# Altium PCB ChristmasTree.PcbDoc
Units mil, origin at the board's own origin, x right, y up, seen from the top; angles counter-clockwise.
Board outline 3307.09 x 3937.01 mil, 2 copper layers (Top Layer, Bottom Layer); 114 components, 133 nets, 342 pads, 10 vias.
Unrouted connection lines stored in the file: 149.
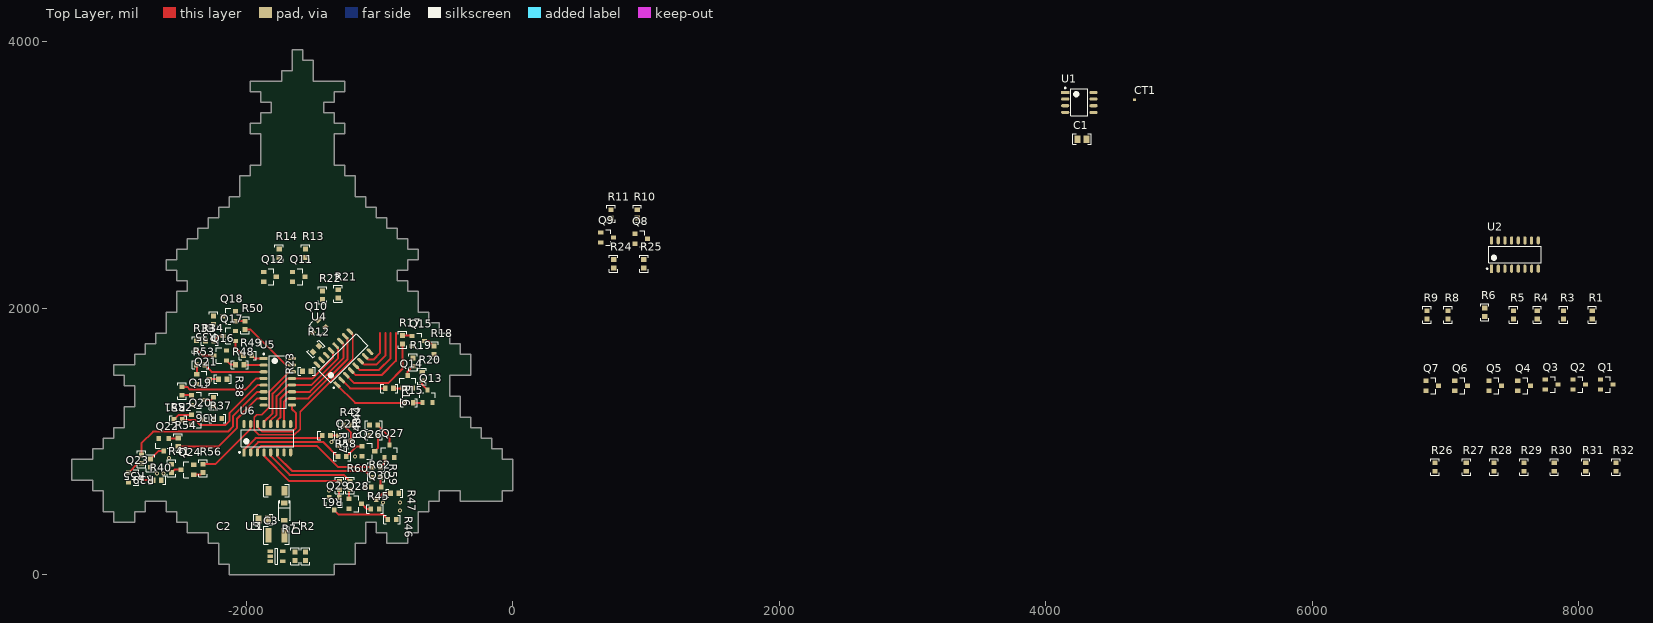
[diagram p0: Top Layer view]
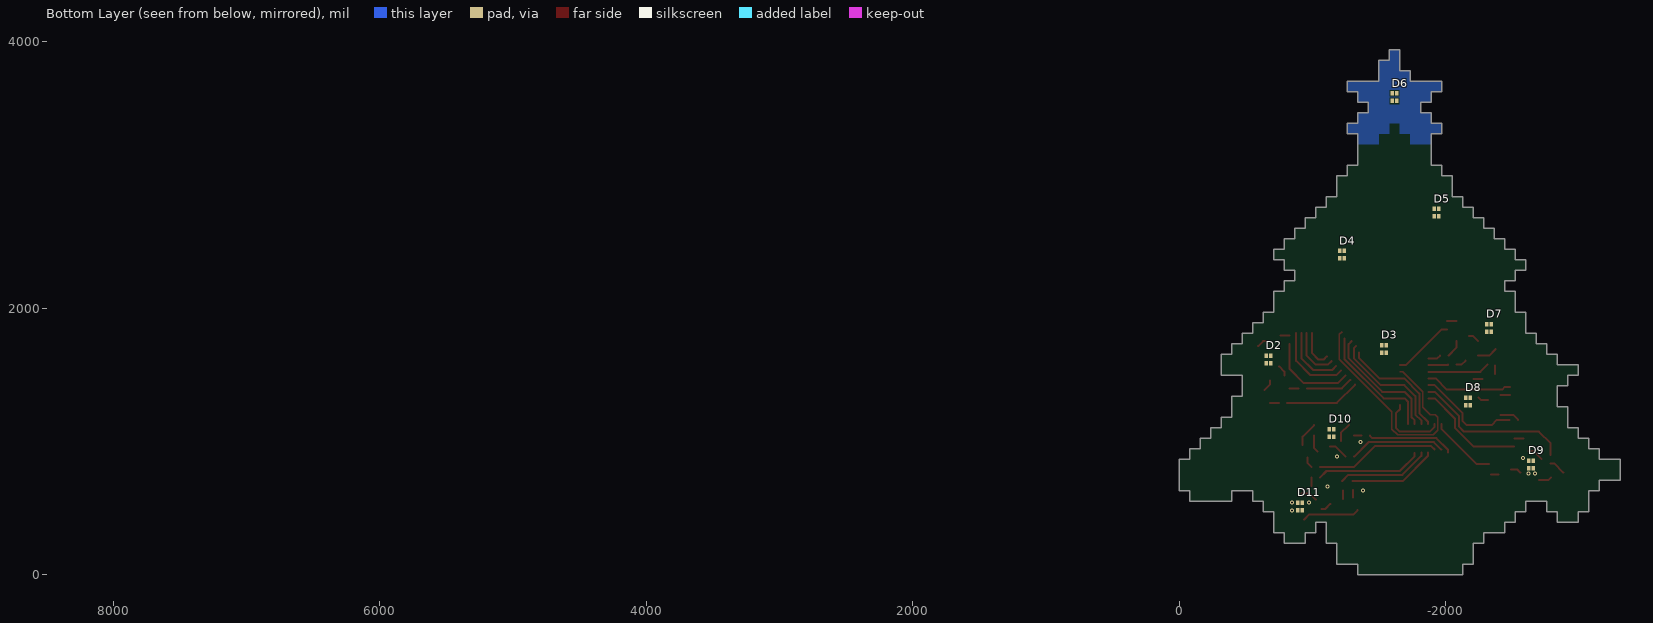
[diagram p1: Bottom Layer view, seen from below]

## Layer stack, top to bottom
Top Solder: solder mask 0.4, Solder Resist, Dk 3.5
Top Layer: signal copper 1.4
Dielectric 1: dielectric 12.6, FR-4, Dk 4.8
Bottom Layer: signal copper 1.4
Bottom Solder: solder mask 0.4, Solder Resist, Dk 3.5

## Board outline
-3149.61,629.92 -3149.61,708.66 -3307.09,708.66 -3307.09,866.14 -3149.61,866.14 -3149.61,944.88 -3070.87,944.88 -3070.87,1023.62 -2992.13,1023.62 -2992.13,1102.36 -2913.39,1102.36 -2913.39,1259.84 -2834.65,1259.84 -2834.65,1417.32 -2913.39,1417.32 -2913.39,1496.06 -2992.13,1496.06 -2992.13,1574.8 -2834.65,1574.8 -2834.65,1653.54 -2755.91,1653.54 -2755.91,1732.28 -2677.17,1732.28 -2677.17,1811.02 -2598.43,1811.02 -2598.43,1968.5 -2519.69,1968.5 -2519.69,2125.98 -2440.94,2125.98 -2440.94,2204.72 -2519.69,2204.72 -2519.69,2283.46 -2598.43,2283.46 -2598.43,2362.2 -2519.69,2362.2 -2519.69,2440.94 -2440.94,2440.94 -2440.94,2519.69 -2362.2,2519.69 -2362.2,2598.43 -2283.46,2598.43 -2283.46,2677.17 -2204.72,2677.17 -2204.72,2755.91 -2125.98,2755.91 -2125.98,2834.65 -2047.24,2834.65 -2047.24,2992.13 -1968.5,2992.13 -1968.5,3070.87 -1889.76,3070.87 -1889.76,3307.09 -1968.5,3307.09 -1968.5,3385.83 -1889.76,3385.83 -1889.76,3464.57 -1811.02,3464.57 -1811.02,3543.31 -1889.76,3543.31 -1889.76,3622.05 -1968.5,3622.05 -1968.5,3700.79 -1732.28,3700.79 -1732.28,3779.53 -1653.54,3779.53 -1653.54,3937.01 -1574.8,3937.01 -1574.8,3858.27 -1496.06,3858.27 -1496.06,3700.79 -1259.84,3700.79 -1259.84,3622.05 -1338.58,3622.05 -1338.58,3543.31 -1417.32,3543.31 -1417.32,3464.57 -1338.58,3464.57 -1338.58,3385.83 -1259.84,3385.83 -1259.84,3307.09 -1338.58,3307.09 -1338.58,3070.87 -1259.84,3070.87 -1259.84,2992.13 -1181.1,2992.13 -1181.1,2834.65 -1102.36,2834.65 -1102.36,2755.91 -1023.62,2755.91 -1023.62,2677.17 -944.88,2677.17 -944.88,2598.43 -866.14,2598.43 -866.14,2519.69 -787.4,2519.69 -787.4,2440.94 -708.66,2440.94 -708.66,2362.2 -787.4,2362.2 -787.4,2283.46 -866.14,2283.46 -866.14,2204.72 -787.4,2204.72 -787.4,2125.98 -708.66,2125.98 -708.66,1968.5 -629.92,1968.5 -629.92,1889.76 -551.18,1889.76 -551.18,1811.02 -472.44,1811.02 -472.44,1732.28 -393.7,1732.28 -393.7,1653.54 -314.96,1653.54 -314.96,1496.06 -472.44,1496.06 -472.44,1338.58 -393.7,1338.58 -393.7,1181.1 -314.96,1181.1 -314.96,1102.36 -236.22,1102.36 -236.22,1023.62 -157.48,1023.62 -157.48,944.88 -78.74,944.88 -78.74,866.14 0,866.14 0,629.92 -78.74,629.92 -78.74,551.18 -393.7,551.18 -393.7,629.92 -551.18,629.92 -551.18,551.18 -629.92,551.18 -629.92,472.44 -708.66,472.44 -708.66,314.96 -787.4,314.96 -787.4,236.22 -944.88,236.22 -944.88,314.96 -1023.62,314.96 -1023.62,393.7 -1102.36,393.7 -1102.36,236.22 -1181.1,236.22 -1181.1,78.74 -1338.58,78.74 -1338.58,0 -2125.98,0 -2125.98,78.74 -2204.72,78.74 -2204.72,236.22 -2283.46,236.22 -2283.46,314.96 -2440.94,314.96 -2440.94,393.7 -2519.69,393.7 -2519.69,472.44 -2598.43,472.44 -2598.43,551.18 -2755.91,551.18 -2755.91,472.44 -2834.65,472.44 -2834.65,393.7 -2992.13,393.7 -2992.13,472.44 -3070.87,472.44 -3070.87,629.92

## Design rules (kind name [scope] priority, off if disabled: settings)
Clearance [All] p1: gap=6.5
PolygonConnect NetC1Poly [InNet('NetC1_2')] p1: connectstyle=Direct reliefconductorwidth=10 reliefentries=4 polygonreliefangle="90 Angle" airgapwidth=10
PolygonConnect [All] p2: connectstyle=Relief reliefconductorwidth=10 reliefentries=4 polygonreliefangle="90 Angle" airgapwidth=10
RoutingVias [All] p1: holewidth=28 width=50 viastyle="Through Hole" minholewidth=28 minwidth=50 maxholewidth=28 maxwidth=50
SolderMaskExpansion [All] p1: expansion=0
Width [All] p1: maxlimit=196.85 minlimit=8 preferedwidth=10
30 further rules are at their usual default settings.

## Components (designator, comment, footprint, x,y, rotation, side; value= is the part's Value field where it differs from the comment)
C1 "100nF" "CAP 0805_N" 4271.65,3267.72 r0 top
C2 "4.7uF" "CAP 0805_N" -1870.08,413.39 r180 top
C3 "22uF" "CAP 1206_N" -1771.65,629.92 r0 top
CT1 "Capacitive Touch" CapTouch 4665.35,3562.99 r90 top
D1 "*" SOD-123-K1A2 -1712.6,472.44 r270 top
D2 "RGB LED Common Anode" "LED LTST-C19HE1WT" -669.29,1614.17 r180 bottom
D3 "RGB LED Common Anode" "LED LTST-C19HE1WT" -1535.43,1692.91 r180 bottom
D4 "RGB LED Common Anode" "LED LTST-C19HE1WT" -1220.47,2401.57 r180 bottom
D5 "RGB LED Common Anode" "LED LTST-C19HE1WT" -1929.13,2716.54 r180 bottom
D6 "RGB LED Common Anode" "LED LTST-C19HE1WT" -1614.17,3582.68 r180 bottom
D7 "RGB LED Common Anode" "LED LTST-C19HE1WT" -2322.83,1850.39 r0 bottom
D8 "RGB LED Common Anode" "LED LTST-C19HE1WT" -2165.35,1299.21 r0 bottom
D9 "RGB LED Common Anode" "LED LTST-C19HE1WT" -2637.8,826.77 r0 bottom
D10 "RGB LED Common Anode" "LED LTST-C19HE1WT" -1141.73,1062.99 r0 bottom
D11 "RGB LED Common Anode" "LED LTST-C19HE1WT" -905.51,511.81 r0 bottom locked
L1 "4.7uH" "CAP 1210_N" -1771.65,295.28 r180 top
Q1 "2N3904" SOT95P245X110-3N 8208.59,1427.16 r0 top
Q2 "2N3904" SOT95P245X110-3N 8001.9,1427.16 r0 top
Q3 "2N3904" SOT95P245X110-3N 7795.21,1427.16 r0 top
Q4 "2N3904" SOT95P245X110-3N 7588.58,1417.32 r0 top
Q5 "2N3904" SOT95P245X110-3N 7372.05,1417.32 r0 top
Q6 "2N3904" SOT95P245X110-3N 7116.14,1417.32 r0 top
Q7 "2N3904" SOT95P245X110-3N 6899.61,1417.32 r0 top
Q8 "2N3904" SOT95P245X110-3N 964.57,2519.69 r0 top
Q9 "2N3904" SOT95P245X110-3N 708.61,2529.52 r0 top
Q10 "2N3904" SOT95P245X110-3N -1466.54,1850.39 r225 top
Q11 "2N3904" SOT95P245X110-3N -1604.38,2234.25 r0 top
Q12 "2N3904" SOT95P245X110-3N -1820.92,2234.25 r0 top
Q13 "2N3904" SOT95P245X110-3N -639.76,1338.58 r90 top
Q14 "2N3904" SOT95P245X110-3N -787.4,1446.85 r90 top
Q15 "2N3904" SOT95P245X110-3N -708.66,1751.97 r0 top
Q16 "2N3904" SOT95P245X110-3N -2194.88,1643.7 r180 top
Q17 "2N3904" SOT95P245X110-3N -2125.98,1791.34 r180 top
Q18 "2N3904" SOT95P245X110-3N -2125.98,1938.98 r180 top
Q19 "2N3904" SOT95P245X110-3N -2362.2,1309.06 r0 top
Q20 "2N3904" SOT95P245X110-3N -2362.2,1161.42 r0 top
Q21 "2N3904" SOT95P245X110-3N -2322.83,1466.54 r0 top
Q22 "2N3904" SOT95P245X110-3N -2618.11,974.41 r270 top
Q23 "2N3904" SOT95P245X110-3N -2834.65,728.35 r0 top
Q24 "2N3904" SOT95P245X110-3N -2440.94,787.4 r180 top
Q25 "2N3904" SOT95P245X110-3N -1259.84,1003.94 r0 top
Q26 "2N3904" SOT95P245X110-3N -1082.68,925.2 r0 top
Q27 "2N3904" SOT95P245X110-3N -925.2,925.2 r90 top
Q28 "2N3904" SOT95P245X110-3N -1181.1,531.5 r0 top
Q29 "2N3904" SOT95P245X110-3N -1338.58,531.5 r270 top
Q30 "2N3904" SOT95P245X110-3N -1023.62,610.24 r270 top
R1 "Res" "RES 0603_N" 8100.39,1948.82 r90 top
R2 "5.62k" "RES 0603_N" -1555.12,137.8 r90 top
R3 "Res" "RES 0603_N" 7883.86,1948.82 r90 top
R4 "Res" "RES 0603_N" 7687.01,1948.82 r90 top
R5 "Res" "RES 0603_N" 7509.84,1948.82 r90 top
R6 "Res" "RES 0603_N" 7293.31,1968.5 r90 top
R7 "1.87k" "RES 0603_N" -1633.86,137.8 r270 top
R8 "Res" "RES 0603_N" 7017.72,1948.82 r270 top
R9 "Res" "RES 0603_N" 6860.24,1948.82 r90 top
R10 "Res" "RES 0603_N" 935.04,2706.69 r90 top
R11 "Res" "RES 0603_N" 738.19,2706.69 r90 top
R12 "Res" "RES 0603_N" -1476.38,1692.91 r45 top
R13 "Res" "RES 0603_N" -1555.12,2411.42 r90 top
R14 "Res" "RES 0603_N" -1751.97,2411.42 r90 top
R15 "Res" "RES 0603_N" -777.56,1289.37 r0 top
R16 "Res" "RES 0603_N" -925.2,1397.64 r0 top
R17 "Res" "RES 0603_N" -826.77,1761.81 r90 top
R18 "Res" "RES 0603_N" -590.55,1683.07 r270 top
R19 "Res" "RES 0603_N" -748.03,1594.49 r90 top
R20 "Res" "RES 0603_N" -679.13,1486.22 r90 top
R21 "Res" "RES 0603_N" -1309.06,2106.3 r270 top
R22 "Res" "RES 0603_N" -1427.17,2096.46 r270 top
R23 "Res" "RES 0603_N" -1545.28,1525.59 r180 top
R24 "Res" "RES 0603_N" 757.83,2332.67 r90 top
R25 "Res" "RES 0603_N" 984.2,2332.67 r90 top
R26 "Res" "RES 0603_N" 6919.24,807.08 r90 top
R27 "Res" "RES 0603_N" 7155.51,807.09 r90 top
R28 "Res" "RES 0603_N" 7362.16,807.08 r90 top
R29 "Res" "RES 0603_N" 7588.53,807.08 r90 top
R30 "Res" "RES 0603_N" 7814.91,807.08 r90 top
R31 "Res" "RES 0603_N" 8051.13,807.08 r90 top
R32 "Res" "RES 0603_N" 8277.56,807.09 r90 top
R33 "Res" "RES 0603_N" -2372.05,1722.44 r270 top
R34 "Res" "RES 0603_N" -2273.62,1751.97 r0 top
R35 "Res" "RES 0603_N" -2244.09,1909.45 r90 top
R36 "Res" "RES 0603_N" -2244.09,1299.21 r90 top
R37 "Res" "RES 0603_N" -2214.57,1171.26 r180 top
R38 "Res" "RES 0603_N" -2175.2,1466.54 r180 top
R39 "Res" "RES 0603_N" -2716.54,836.61 r90 top
R40 "Res" "RES 0603_N" -2667.32,708.66 r180 top
R41 "Res" "RES 0603_N" -2559.06,797.24 r270 top
R42 "Res" "RES 0603_N" -1240.16,1122.05 r180 top
R43 "Res" "RES 0603_N" -1043.31,1043.31 r0 top
R44 "Res" "RES 0603_N" -1043.31,1122.05 r0 top
R45 "Res" "RES 0603_N" -1033.46,492.13 r180 top
R46 "Res" "RES 0603_N" -905.51,413.39 r180 top
R47 "Res" "RES 0603_N" -885.83,610.24 r180 top
R48 "Res" "RES 0603_N" -2047.24,1574.8 r180 top
R49 "Res" "RES 0603_N" -1988.19,1643.7 r180 top
R50 "Res" "RES 0603_N" -2007.87,1870.08 r90 top
R51 "Res" "RES 0603_N" -2480.32,1377.95 r270 top
R52 "Res" "RES 0603_N" -2509.84,1161.42 r180 top
R53 "Res" "RES 0603_N" -2342.52,1574.8 r180 top
R54 "Res" "RES 0603_N" -2509.84,994.09 r90 top
R55 "Res" "RES 0603_N" -2785.43,866.14 r270 top
R56 "Res" "RES 0603_N" -2322.83,797.24 r270 top
R57 "Res" "RES 0603_N" -1397.64,1043.31 r0 top
R58 "Res" "RES 0603_N" -1279.53,885.83 r0 top
R59 "Res" "RES 0603_N" -1023.62,807.09 r0 top
R60 "Res" "RES 0603_N" -1220.47,669.29 r270 top
R61 "Res" "RES 0603_N" -1299.21,669.29 r270 top
R62 "Res" "RES 0603_N" -1023.62,728.35 r0 top
U1 "PIC12(L)F1571/2" SOIC127P600X175-8N 4251.97,3543.31 r0 top
U2 "74HC595" SOIC127P600X175-16N 7519.68,2401.57 r90 top
U3 "MIC2288" SOT23-5 -1771.65,137.8 r0 top
U4 "74HC595" SOIC127P600X175-16N -1269.69,1624.02 r135 top
U5 "74HC595" SOIC127P600X175-16N -1761.81,1446.85 r0 top
U6 "74HC595" SOIC127P600X175-16N -1840.55,1023.62 r90 top

## Footprints (in the part's own frame and the unit in brackets; to place one, negate y for a bottom-side part, rotate by r counter-clockwise, add the part's x,y. Pads: shape width x height; smd on the part's side, far side on the other; paste and mask are expansions set on the pad)
"CAP 0805_N" [mm] "Chip Capacitor, Body 2.0x1.2mm, Height 0.75mm, IPC Medium Density"
  rect 1.15x1.45 smd: 1(-0.9,0) 2(0.9,0)
  silkscreen extent -1.8,-1 1.8,1, body extent -1.1,-0.72 1.1,0.73, height 0.75
"CAP 1206_N" [mm] "Chip Capacitor, Body 3.2x1.6mm, Height 0.75mm, IPC Medium Density"
  rect 1.15x1.8 smd: 1(-1.5,0) 2(1.5,0)
  silkscreen extent -2.4,-1.2 2.4,1.2, body extent -1.7,-0.9 1.7,0.9, height 0.75
"CAP 1210_N" [mm] "Chip Capacitor, Body 3.2x2.5mm, Height 0.7mm, IPC Medium Density"
  rect 1.15x2.7 smd: 1(-1.5,0) 2(1.5,0)
  silkscreen extent -2.4,-1.7 2.4,1.7, body extent -1.7,-1.35 1.7,1.35, height 0.7
CapTouch [mil]
  rect 20x20 smd paste+0 mask+0: 1(0,0)
"LED LTST-C19HE1WT" [mm]
  rect 0.65x0.85 smd: 1(-0.425,0.725) 2(0.425,0.725) 3(0.425,-0.725) 4(-0.425,-0.725)
"RES 0603_N" [mm] "Chip Resistor, Body 1.6x0.8mm, IPC Medium Density"
  rect 0.9x1 smd: 1(-0.8,0) 2(0.8,0)
  silkscreen extent -1.6,-0.8 1.6,0.8, body extent -0.8,-0.4 0.8,0.4, height 0.46
SOD-123-K1A2 [mm] "SOD, 2-Leads, Body 2.69x1.6mm"
  rect 0.91x1.22 smd: 1(-1.635,0) 2(1.635,0)
  silkscreen extent -2.2,-1.1 1.6,1.1, body extent -1.35,-0.8 1.35,0.8, height 1.36
SOIC127P600X175-8N [mm] "SOIC, 8-Leads, Body 4.95x3.90mm, Pitch 1.27mm, IPC Medium Density"
  rect 1.55x0.6 smd: 1(-2.7,1.905)
  oval 1.55x0.6 smd: 2(-2.7,0.635) 3(-2.7,-0.635) 4(-2.7,-1.905) 5(2.7,-1.905) 6(2.7,-0.635) 7(2.7,0.635) 8(2.7,1.905)
  silkscreen extent -2.82,-2.55 1.6,2.88, body extent -3.03,-2.5 3.03,2.5, height 1.9
SOIC127P600X175-16N [mm] "SOIC, 16-Leads, Body 9.90x3.90mm, Pitch 1.27mm, IPC Medium Density"
  rect 1.55x0.6 smd: 1(-2.7,4.445)
  oval 1.55x0.6 smd: 2(-2.7,3.175) 3(-2.7,1.905) 4(-2.7,0.635) 5(-2.7,-0.635) 6(-2.7,-1.905) 7(-2.7,-3.175) 8(-2.7,-4.445) 9(2.7,-4.445) 10(2.7,-3.175) 11(2.7,-1.905) 12(2.7,-0.635) 13(2.7,0.635) 14(2.7,1.905) 15(2.7,3.175) 16(2.7,4.445)
  silkscreen extent -2.82,-5 1.6,5.42, body extent -3.03,-5 3.03,5, height 1.9
SOT23-5 [mm] "SOT23, 5-Leads, Body 2.90x2.80mm, Pitch 0.95mm, IPC Medium Density"
  rect 1.1x0.6 smd: 1(-1.2,0.95) 2(-1.2,0) 3(-1.2,-0.95) 4(1.2,-0.95) 5(1.2,0.95)
  silkscreen extent -0.25,-1.55 0.25,1.55, body extent -1.4,-1.45 1.4,1.45, height 1.45
SOT95P245X110-3N [mm] "SOT23, 3-Leads, Body 2.90x2.45mm, Pitch 0.95mm, IPC Medium Density"
  rect 1x0.8 smd: 1(-1.2,0.95) 2(-1.2,-0.95) 3(1.2,0)
  silkscreen extent -0.3,-1.5 0.7,1.5, body extent -1.3,-1.5 1.3,1.5, height 1.1

## Part data
C1 C2 C3: library part "-Cap Non-Pol", "CAP, CER"
D1: library part "-Diode Schottky K1A2", "2 Pin Schottky K1A2"
L1: library part -Inductor, "IND"
Q1 Q2 Q3 Q4 Q5 Q6 Q7 Q8 Q9 Q10 Q11 Q12 Q13 Q14 Q15 Q16 Q17 Q18 Q19 Q20 Q21 Q22 Q23 Q24 Q25 Q26 Q27 Q28 Q29 Q30: "NPN General Purpose Amplifier"
R1 R3 R4 R5 R6 R8 R9 R10 R11 R12 R13 R14 R15 R16 R17 R18 R19 R20 R21 R22 R23 R24 R25 R26 R27 R28 R29 R30 R31 R32 R33 R34 R35 R36 R37 R38 R39 R40 R41 R42 R43 R44 R45 R46 R47 R48 R49 R50 R51 R52 R53 R54 R55 R56 R57 R58 R59 R60 R61 R62: "Resistor"
R2 R7: library part -Resistor, "RES, SMD"

## Via types
v1: diameter 30, hole 15, Top Layer to Bottom Layer, 10 vias

## Nets (pads, with @x,y where several pads share a name; then routed paths per layer and width w, separated by ;. In a path a pad name is that pad's centre, name@x,y a point inside that pad or via, vN(x,y) a via of type N, cw(c..) or ccw(c..) an arc to the next point about the centre after c; other vN are vias at no path point)
GND: C1.2 C2.1 C3.1 Q1.2 Q2.2 Q3.2 Q4.2 Q5.2 Q6.2 Q7.2 Q8.2 Q9.2 Q10.2 Q11.2 Q12.2 Q13.2 Q14.2 Q15.2 Q16.2 Q17.2 Q18.2 Q19.2 Q20.2 Q21.2 Q22.2 Q23.2 Q24.2 Q25.2 Q26.2 Q27.2 Q28.2 Q29.2 Q30.2 R7.1 U1.8 U2.8 U3.2 U4.8 U5.8 U6.8
  other v1: -1377.95,629.92 -1112.2,659.45 -1181.1,885.83 -1358.27,994.09
NetC2_2: C2.2 L1.1 U3.4 U3.5
NetCT1_1: CT1.1 U1.7
NetD1_2: D1.2 L1.2 U3.1
NetD2_1: D2.1 R18.2
NetD2_2: D2.2 R19.2
NetD2_3: D2.3 R20.2
NetD3_1: D3.1 R21.2
NetD3_2: D3.2 R22.2
NetD3_3: D3.3 R23.2
NetD4_1: D4.1 R24.2
NetD4_2: D4.2 R25.2
NetD4_3: D4.3 R26.2
NetD5_1: D5.1 R27.2
NetD5_2: D5.2 R28.2
NetD5_3: D5.3 R29.2
NetD6_1: D6.1 R30.2
NetD6_2: D6.2 R31.2
NetD6_3: D6.3 R32.2
NetD7_1: D7.1 R33.1
NetD7_2: D7.2 R34.1
NetD7_3: D7.3 R35.1
NetD8_1: D8.1 R36.1
NetD8_2: D8.2 R37.1
NetD8_3: D8.3 R38.1
NetD9_1: D9.1 R39.1
  other v1: -2667.32,757.87
NetD9_2: D9.2 R40.1
  other v1: -2618.11,757.87
NetD9_3: D9.3 R41.1
  other v1: -2578.74,875.98
NetD10_1: D10.1 R42.1
NetD10_2: D10.2 R43.1
NetD10_3: D10.3 R44.1
NetD11_1: D11.1 R45.1
NetD11_2: D11.2 R46.1
NetD11_3: D11.3 R47.1
NetQ1_1: Q1.1 R1.2
NetQ1_3: Q1.3 R32.1
NetQ2_1: Q2.1 R3.2
NetQ2_3: Q2.3 R31.1
NetQ3_1: Q3.1 R4.2
NetQ3_3: Q3.3 R30.1
NetQ4_1: Q4.1 R5.2
NetQ4_3: Q4.3 R29.1
NetQ5_1: Q5.1 R6.2
NetQ5_3: Q5.3 R28.1
NetQ6_1: Q6.1 R8.2
NetQ6_3: Q6.3 R27.1
NetQ7_1: Q7.1 R9.2
NetQ7_3: Q7.3 R26.1
NetQ8_1: Q8.1 R10.2
NetQ8_3: Q8.3 R25.1
NetQ9_1: Q9.1 R11.2
NetQ9_3: Q9.3 R24.1
NetQ10_1: Q10.1 R12.2
NetQ10_3: Q10.3 R23.1
NetQ11_1: Q11.1 R13.2
NetQ11_3: Q11.3 R22.1
NetQ12_1: Q12.1 R14.2
NetQ12_3: Q12.3 R21.1
NetQ13_1: Q13.1 R15.2 | length 66.9
  Top Layer w15: R15.2 Q13.1@-679.13,1289.37
NetQ13_3: Q13.3 R20.1 | length 85.2
  Top Layer w15: R20.1 -679.13,1425.2 Q13.3
NetQ14_1: Q14.1 R16.2 | length 66.9
  Top Layer w15: R16.2 Q14.1@-826.77,1397.64
NetQ14_3: Q14.3 R19.1 | length 85.2
  Top Layer w15: Q14.3 -787.4,1523.62 R19.1
NetQ15_1: Q15.1 R17.2 | length 66.9
  Top Layer w15: R17.2 Q15.1@-759.84,1793.31
NetQ15_3: Q15.3 R18.1 | length 86.4
  Top Layer w15: Q15.3 -627.95,1751.97 R18.1
NetQ16_1: Q16.1 R48.2 | length 81.9
  Top Layer w15: Q16.1 -2116.14,1574.8 R48.2
NetQ16_3: Q16.3 R33.2 | length 149.5
  Top Layer w15: R33.2 -2324.8,1643.7 Q16.3
NetQ17_1: Q17.1 R49.2 | length 134.7
  Top Layer w15: Q17.1 -2078.74,1702.76 R49.2
NetQ17_3: Q17.3 R34.2 | length 85.2
  Top Layer w15: R34.2 -2202.76,1791.34 Q17.3
NetQ18_1: Q18.1 R50.2 | length 70.9
  Top Layer w15: Q18.1 R50.2
NetQ18_3: Q18.3 R35.2
NetQ19_1: Q19.1 R51.2 | length 70.9
  Top Layer w15: R51.2 Q19.1
NetQ19_3: Q19.3 R36.2 | length 79.8
  Top Layer w15: Q19.3 -2265.75,1309.06 R36.2
NetQ20_1: Q20.1 R52.2 | length 147.4
  Top Layer w15: R52.2 -2503.94,1198.82 Q20.1
NetQ20_3: Q20.3 R37.2
NetQ21_1: Q21.1 R53.2 | length 66.9
  Top Layer w15: Q21.1 R53.2@-2370.08,1570.87
NetQ21_3: Q21.3 R38.2 | length 68.9
  Top Layer w15: Q21.3 R38.2
NetQ22_1: Q22.1 R54.2 | length 66.9
  Top Layer w15: Q22.1 R54.2@-2513.78,1021.65
NetQ22_3: Q22.3 R39.2 | length 122.9
  Top Layer w15: R39.2 -2657.48,927.17 Q22.3
NetQ23_1: Q23.1 R55.2 | length 125
  Top Layer w15: Q23.1 -2812.99,834.65 R55.2
NetQ23_3: Q23.3 R40.2 | length 96.7
  Top Layer w15: Q23.3 -2767.72,708.66 R40.2
NetQ24_1: Q24.1 R56.2 | length 55.1
  Top Layer w15: Q24.1 R56.2@-2338.58,750
NetQ24_3: Q24.3 R41.2 | length 79.8
  Top Layer w15: R41.2 -2537.4,787.4 Q24.3
NetQ25_1: Q25.1 R57.2 | length 57.1
  Top Layer w15: R57.2 Q25.1@-1309.06,1043.31
NetQ25_3: Q25.3 R42.2 | length 142.6
  Top Layer w15: R42.2 -1212.6,1062.99 Q25.3
NetQ26_1: Q26.1 R58.2 | length 149.9
  Top Layer w15: R58.2 -1171.26,962.6 Q26.1
NetQ26_3: Q26.3 R43.2 | length 127.9
  Top Layer w15: Q26.3 -1011.81,948.82 R43.2
NetQ27_1: Q27.1 R59.2 | length 83.1
  Top Layer w15: R59.2 -962.6,836.61 Q27.1
NetQ27_3: Q27.3 R44.2 | length 185.5
  Top Layer w15: R44.2 -925.2,1035.43 Q27.3
NetQ28_1: Q28.1 R60.2 | length 61
  Top Layer w15: Q28.1 R60.2@-1228.35,629.92
NetQ28_3: Q28.3 R45.2 | length 85.2
  Top Layer w15: Q28.3 -1094.49,492.13 R45.2
NetQ29_1: Q29.1 R61.2 | length 57.1
  Top Layer w15: Q29.1 R61.2@-1301.18,635.83
NetQ29_3: Q29.3 R46.2 | length 430.9
  Top Layer w15: Q29.3 -1307.09,452.76 -976.38,452.76 R46.2
NetQ30_1: Q30.1 R62.2 | length 65
  Top Layer w15: Q30.1@-992.13,663.39 R62.2
NetQ30_3: Q30.3 R47.2 | length 125.9
  Top Layer w15: Q30.3 -976.38,610.24 R47.2
NetR1_1: R1.1 U2.6
NetR2_1: R2.1 R7.2 U3.3
NetR3_1: R3.1 U2.5
NetR4_1: R4.1 U2.4
NetR5_1: R5.1 U2.3
NetR6_1: R6.1 U2.2
NetR8_1: R8.1 U2.1
NetR9_1: R9.1 U2.15
NetR10_1: R10.1 U4.7 | length 289.6
  Top Layer w15: U4.7 -1083.07,1614.17 -1043.31,1614.17 -994.09,1663.39 -994.09,1811.02
NetR11_1: R11.1 U4.6 | length 393.8
  Top Layer w15: U4.6 -1114.41,1574.8 -1023.62,1574.8 -954.72,1643.7 -954.72,1811.02
NetR12_1: R12.1 U4.5 | length 498.1
  Top Layer w15: U4.5 -1145.75,1535.43 -1003.94,1535.43 -915.35,1624.02 -915.35,1811.02
NetR13_1: R13.1 U4.4 | length 602.3
  Top Layer w15: U4.4 -1177.09,1496.06 -984.25,1496.06 -875.98,1604.33 -875.98,1811.02
NetR15_1: R15.1 U4.1 | length 565.4
  Top Layer w15: U4.1 -1182.53,1289.37 R15.1
NetR16_1: R16.1 U4.2 | length 352.2
  Top Layer w15: U4.2 -1220.08,1397.64 R16.1
NetR17_1: R17.1 U4.3 | length 675
  Top Layer w15: U4.3 -1188.74,1437.01 -935.04,1437.01 -826.77,1545.28 R17.1
NetR48_1: R48.1 U5.2 | length 148.9
  Top Layer w15: R48.1 -2012.8,1571.85 U5.2
NetR49_1: R49.1 U5.1 | length 97.6
  Top Layer w15: R49.1 -1934.84,1621.85 U5.1
NetR50_1: R50.1 U5.15 | length 462.8
  Top Layer w15: R50.1 -1966.54,1838.58 -1699.8,1571.85 U5.15
NetR51_1: R51.1 U5.4 | length 656
  Top Layer w15: R51.1 -2442.91,1409.45 -2421.26,1387.8 -2007.87,1387.8 -1923.82,1471.85 U5.4
NetR52_1: R52.1 U5.5 | length 785.3
  Top Layer w15: R52.1 -2381.89,1161.42 -2342.52,1122.05 -2155.51,1122.05 -2125.98,1151.57 -2125.98,1210.63 -1914.76,1421.85 U5.5
NetR53_1: R53.1 U5.3 | length 464.8
  Top Layer w15: R53.1 -2258.07,1521.85 U5.3
NetR54_1: R54.1 U5.7 | length 830.9
  Top Layer w15: R54.1 -2206.69,962.6 -2066.93,1102.36 -2066.93,1171.26 -1916.34,1321.85 U5.7
NetR55_1: R55.1 U5.6 | length 1210.6
  Top Layer w15: R55.1 -2785.43,984.25 -2696.85,1072.83 -2135.83,1072.83 -2096.46,1112.2 -2096.46,1190.94 -1915.55,1371.85 U5.6
NetR56_1: R56.1 U6.15 | length 502.2
  Top Layer w15: R56.1 -2232.28,828.74 -1965.55,1095.47 U6.15
NetR57_1: R57.1 U6.1 | length 650.2
  Top Layer w15: U6.1 -2015.55,937.2 -1929.13,1023.62 -1448.82,1023.62 R57.1
NetR58_1: R58.1 U6.2 | length 722.6
  Top Layer w15: U6.2@-1965.55,937.99 -1909.45,994.09 -1419.29,994.09 R58.1
NetR59_1: R59.1 U6.3 | length 936.3
  Top Layer w15: U6.3@-1915.55,938.78 -1889.76,964.57 -1466.54,964.57 -1309.06,807.09 R59.1
NetR60_1: R60.1 U6.5 | length 700.6
  Top Layer w15: U6.5 -1815.55,890.35 -1673.23,748.03 -1267.72,748.03 R60.1
NetR61_1: R61.1 U6.4 | length 671.4
  Top Layer w15: U6.4 -1865.55,891.14 -1675.2,700.79 R61.1
NetR62_1: R62.1 U6.6 | length 801.9
  Top Layer w15: U6.6@-1765.55,914.24 -1765.55,889.57 -1653.54,777.56 -1104.33,777.56 R62.1
NetU1_2: U1.2 U2.14
NetU1_3: U1.3 U2.13 U4.13 U5.13 U6.13 | length 861.2
  Top Layer w15: U6.13 -1865.55,1146.26 -1801.18,1210.63 -1801.18,1358.27 -1687.6,1471.85 U5.13 -1500.59,1471.85 -1348.43,1624.02 U4.13@-1348.43,1667.4
NetU1_4: U1.4 U2.12 U4.12 U5.12 U6.12 | length 908
  Top Layer w15: U6.12 -1815.55,1156.89 -1771.65,1200.79 -1771.65,1338.58 -1688.39,1421.85 U5.12 -1511.22,1421.85 -1309.06,1624.02 -1309.06,1698.74 U4.12
NetU1_5: U1.5 U2.11 U4.11 U5.11 U6.11 | length 934.9
  Top Layer w15: U6.11 -1765.55,1157.68 -1742.13,1181.1 -1742.13,1318.9 -1689.17,1371.85 U5.11 -1521.85,1371.85 -1269.69,1624.02 -1269.69,1730.08 U4.11
NetU1_6: U1.6 U2.10 U4.10 U5.10 U6.10 | length 930.5
  Top Layer w15: U6.10 -1715.55,1296.26 -1689.96,1321.85 U5.10 -1532.48,1321.85 -1240.16,1614.17 U4.10@-1240.16,1771.26
NetU2_9: U2.9 U4.14
NetU4_9: U4.9 U5.14 | length 1869.5
  Top Layer w10: U5.14 -1676.97,1521.85 -1826.1,1372.72 -1826.1,1257.58 -1882.9,1200.79 -1919.29,1200.79 -1938.98,1181.1 -1938.98,1082.68 -1904.53,1048.23 -1638.78,1048.23 -1594.49,1092.52 -1594.49,1220.47 -1200.79,1614.17 -1200.79,1802.61 U4.9
NetU5_9: U5.9 U6.14 | length 522.5
  Top Layer w15: U6.14 -1915.55,1108.46 -1879.92,1072.83 -1653.54,1072.83 -1624.02,1102.36 -1624.02,1210.63 -1655.51,1242.13 U5.9
VCC: C1.1 C3.2 D1.1 D2.4 D3.4 D4.4 D5.4 D6.4 D7.4 D8.4 D9.4 D10.4 D11.4 R2.2 U1.1 U2.16 U4.16 U5.16 U6.16
pads on no net: R14.1 U2.7 U4.15 U6.7 U6.9
copper on no net:
  other v1: -846.46,482.28 -974.41,541.34 -846.46,541.34

## Polygon pours and split planes (outlines as drawn)
no net on Bottom Layer "Top Layer-No Net" (solid, pour order 8): -1889.76,3228.35 -1732.28,3228.35 -1732.28,3307.09 -1653.54,3307.09 -1653.54,3385.83 -1574.8,3385.83 -1574.8,3307.09 -1496.06,3307.09 -1496.06,3228.35 -1338.58,3228.35 -1338.58,3307.09 -1259.84,3307.09 -1259.84,3385.83 -1338.58,3385.83 -1338.58,3464.57 -1417.32,3464.57 -1417.32,3543.31 -1338.58,3543.31 -1338.58,3622.05 -1259.84,3622.05 -1259.84,3700.79 -1496.06,3700.79 -1496.06,3858.27 -1574.8,3858.27 -1574.8,3937.01 -1653.54,3937.01 -1653.54,3779.53 -1732.28,3779.53 -1732.28,3700.79 -1968.5,3700.79 -1968.5,3622.05 -1889.76,3622.05 -1889.76,3543.31 -1811.02,3543.31 -1811.02,3464.57 -1889.76,3464.57 -1889.76,3385.83 -1968.5,3385.83 -1968.5,3307.09 -1889.76,3307.09

## Silkscreen, mask and mechanical layers (free items; w line width, h text height)
Mechanical 1:
  drawing of 173 lines, arcs and shapes, not listed